# Altium PCB BMS_V1.PcbDoc
Units mil, origin at the board's own origin, x right, y up, seen from the top; angles counter-clockwise.
Board outline 3685 x 3275 mil, 4 copper layers (Top Layer, Layer 1, Layer 2, Bottom Layer), stack 23.756 mil thick; 58 components, 44 nets, 261 pads, 41 vias.
Unrouted connection lines stored in the file: 2.
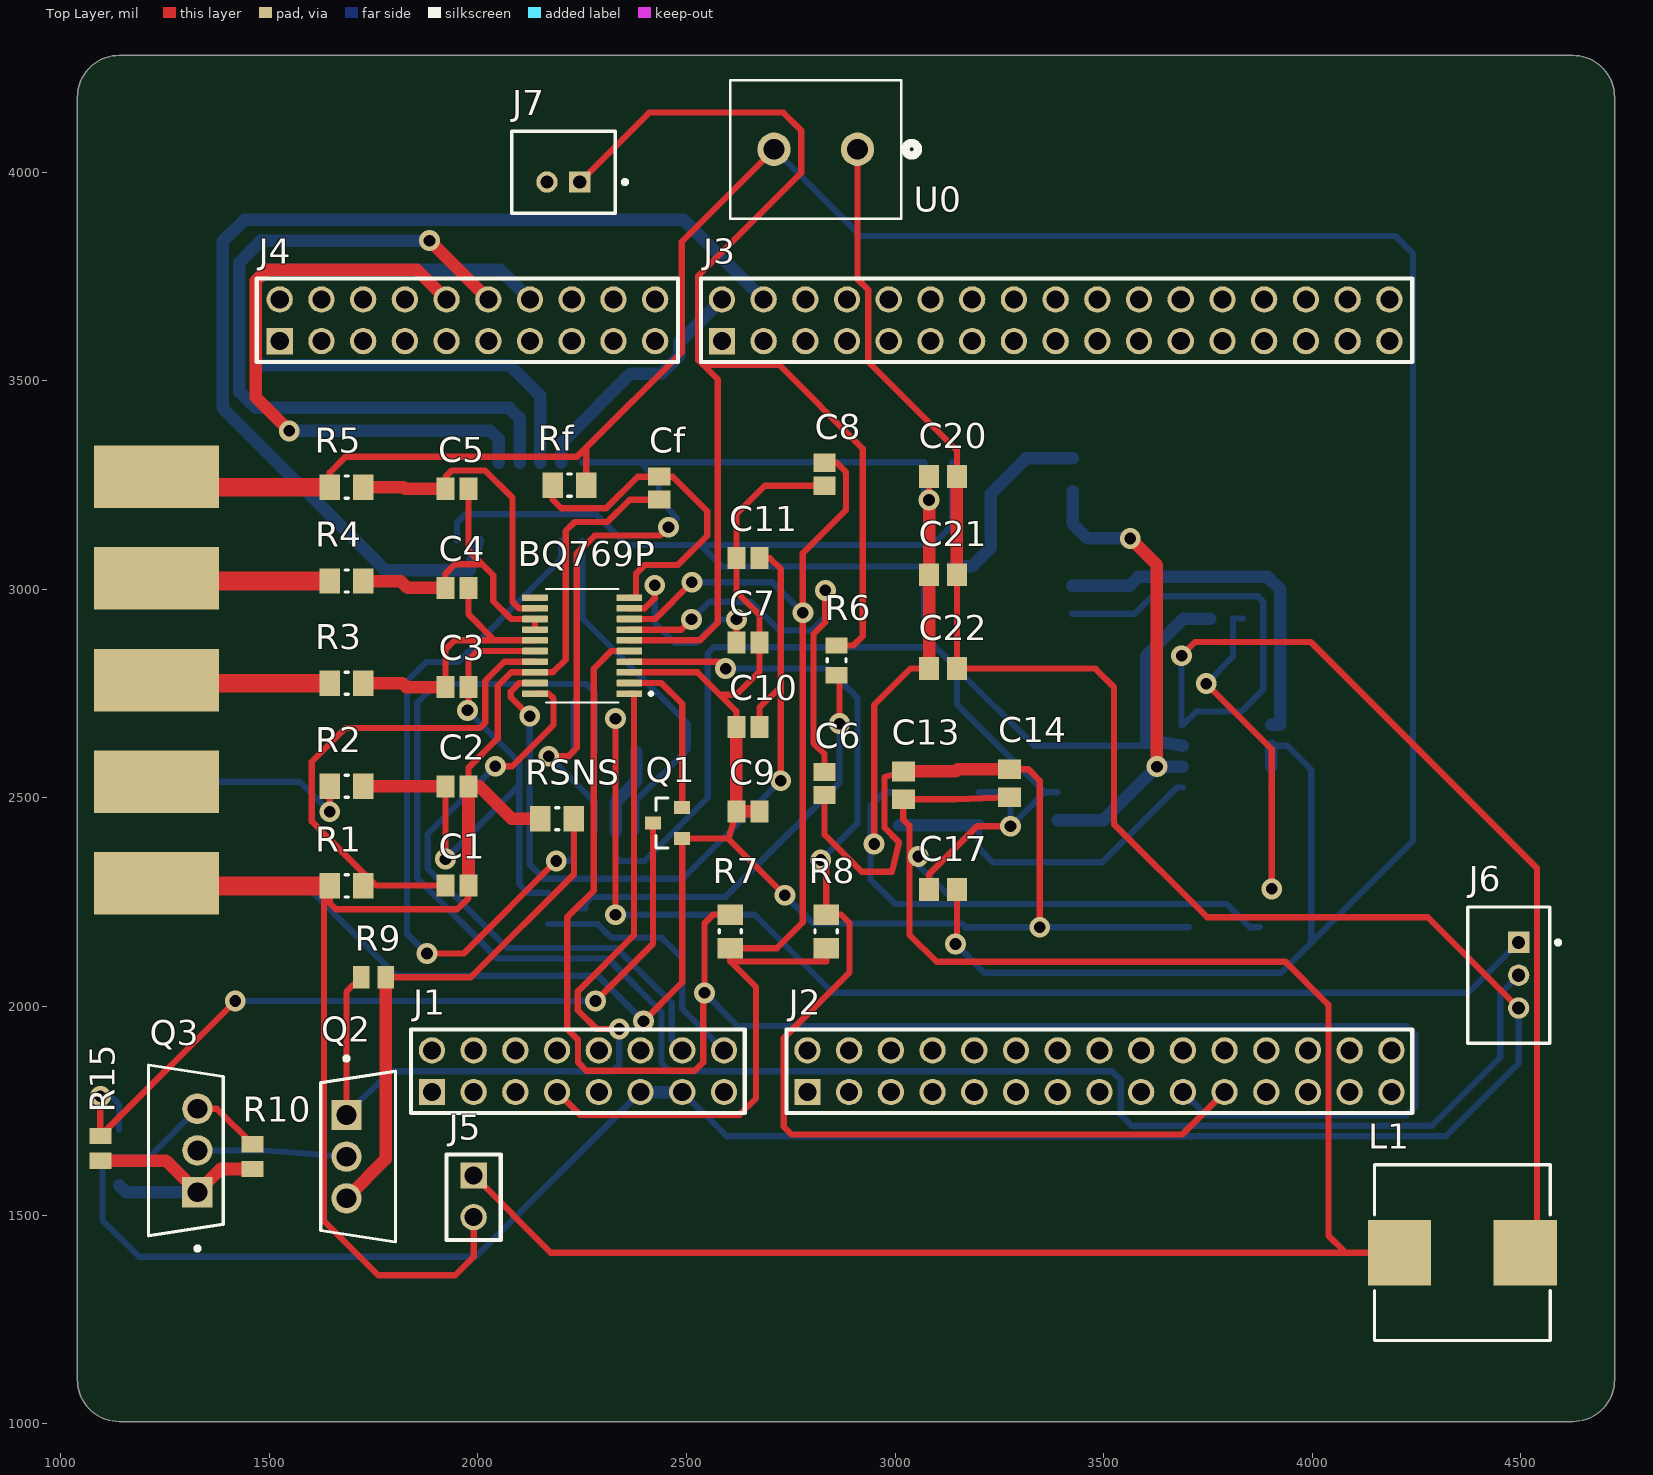
[diagram p0: Top Layer view]
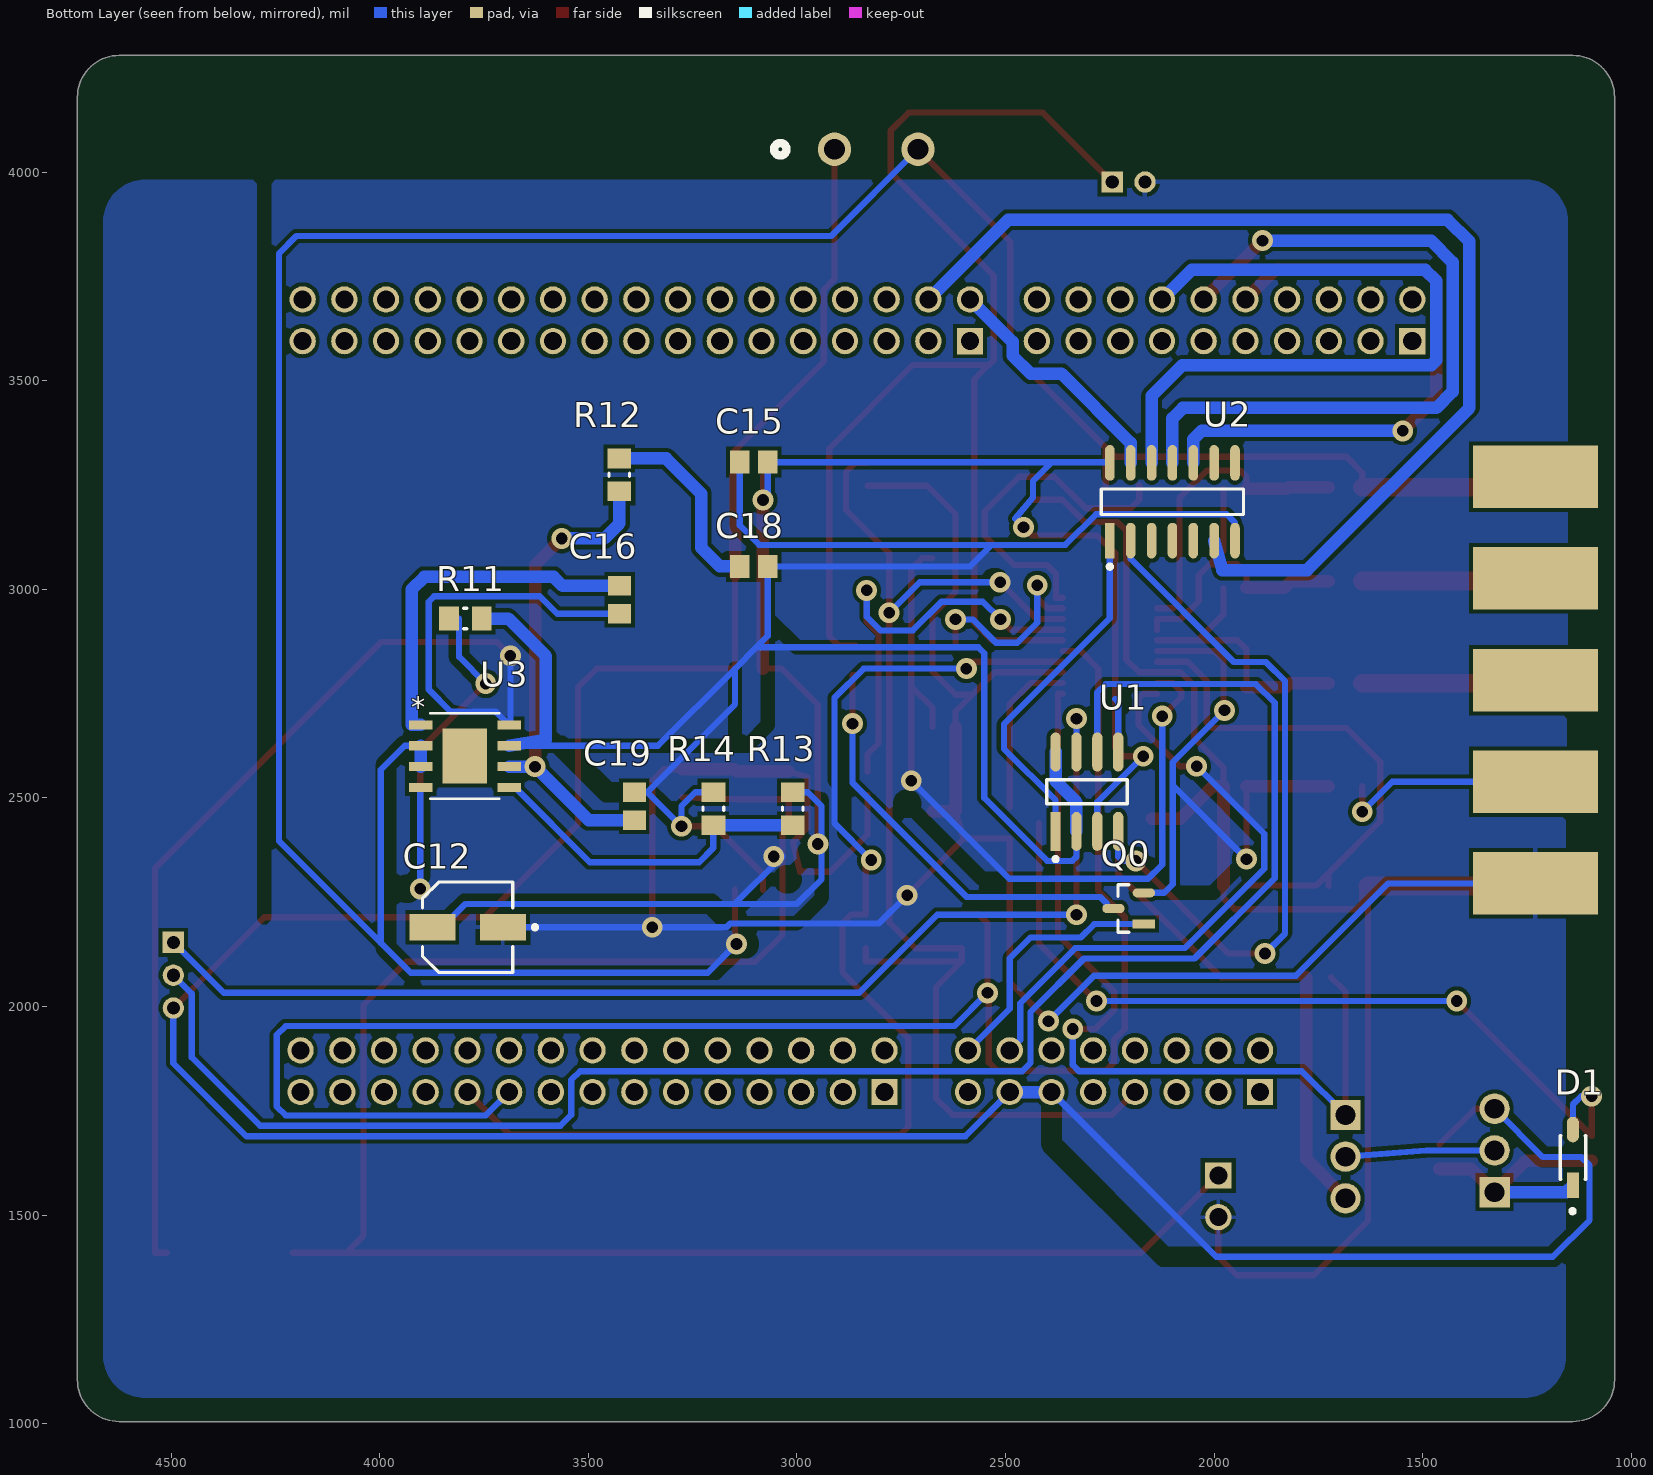
[diagram p1: Bottom Layer view, seen from below]
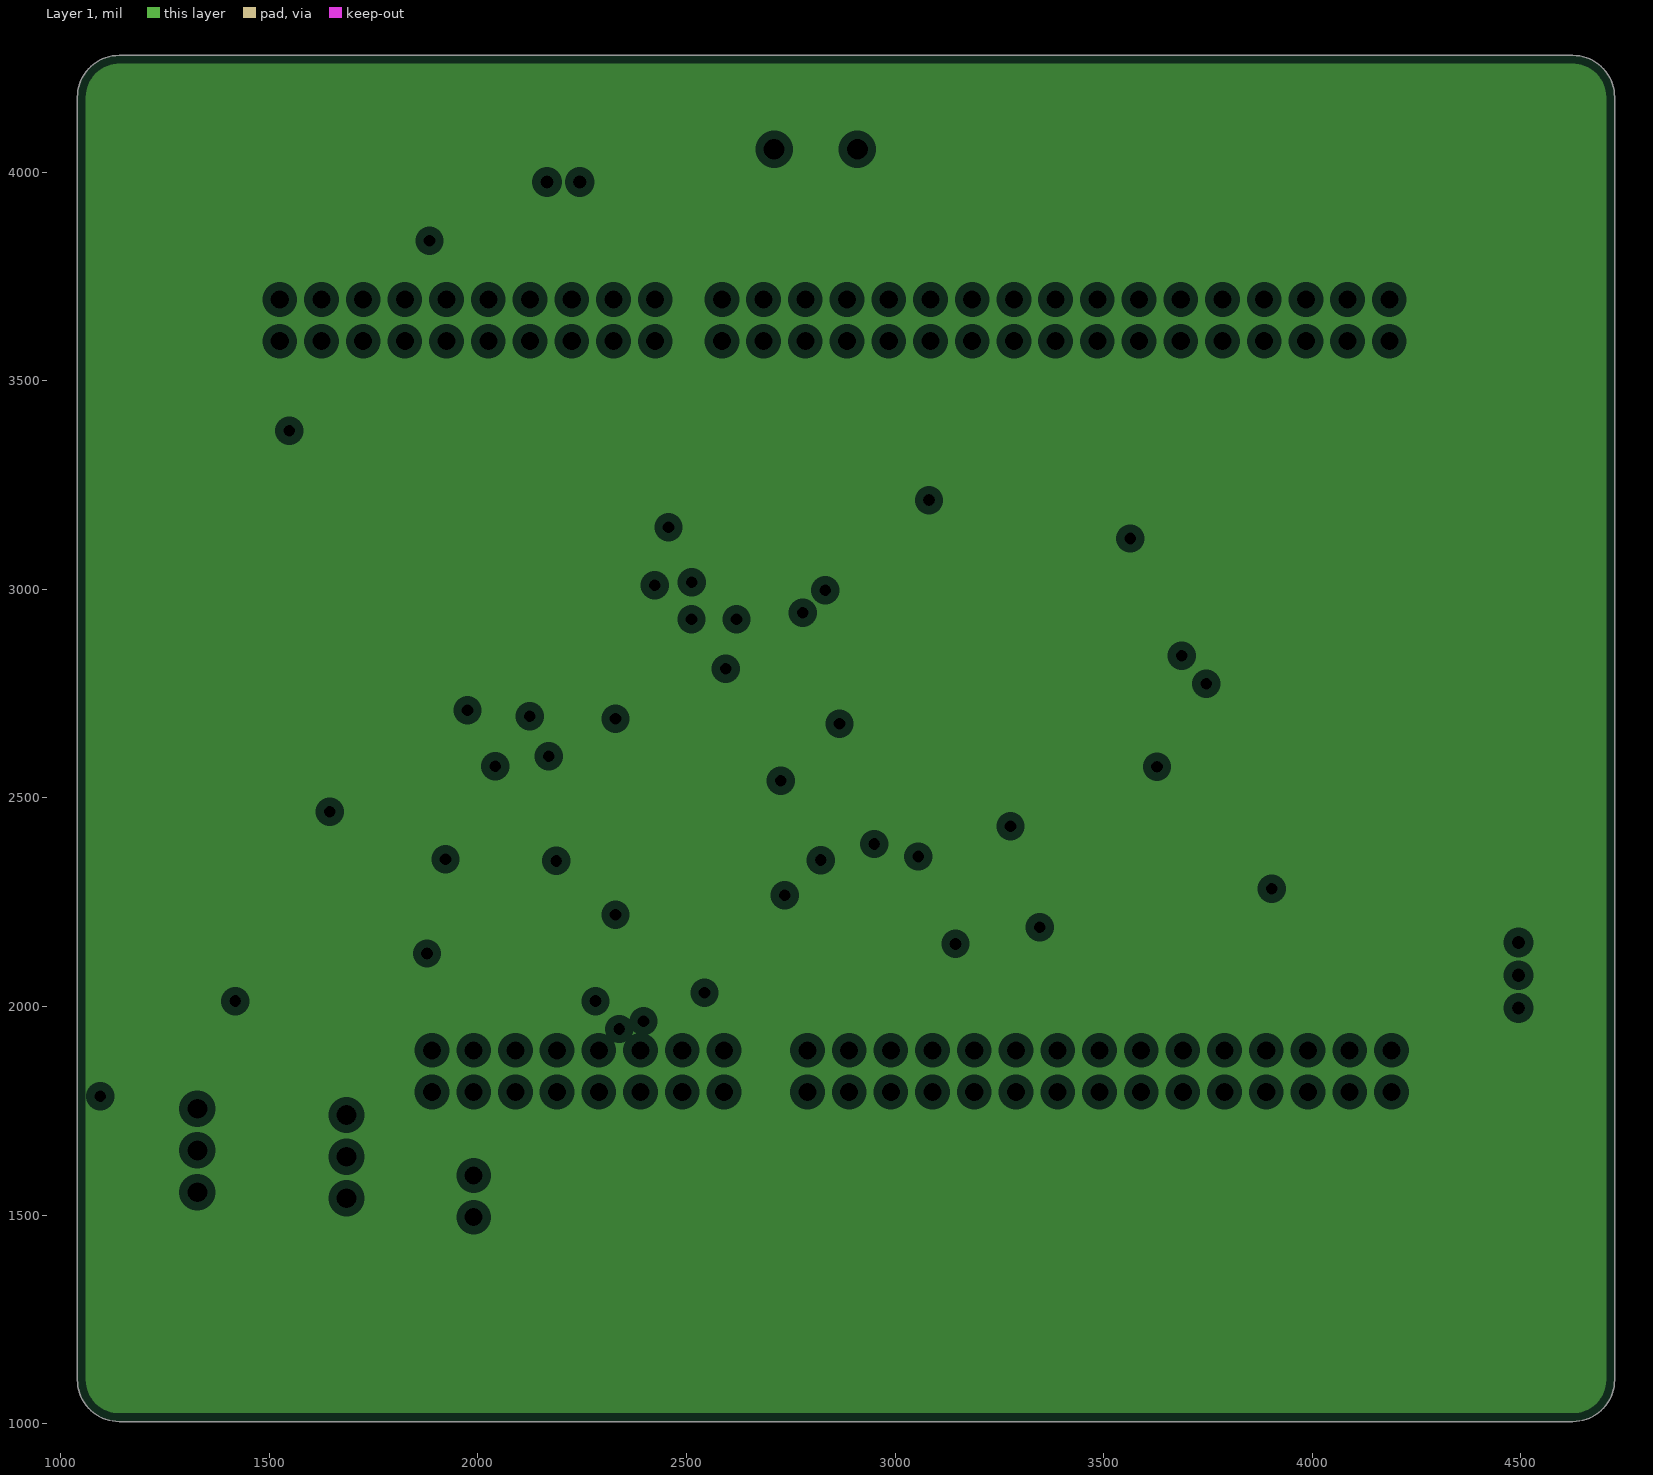
[diagram p2: Layer 1, clearances drawn from the general rule]
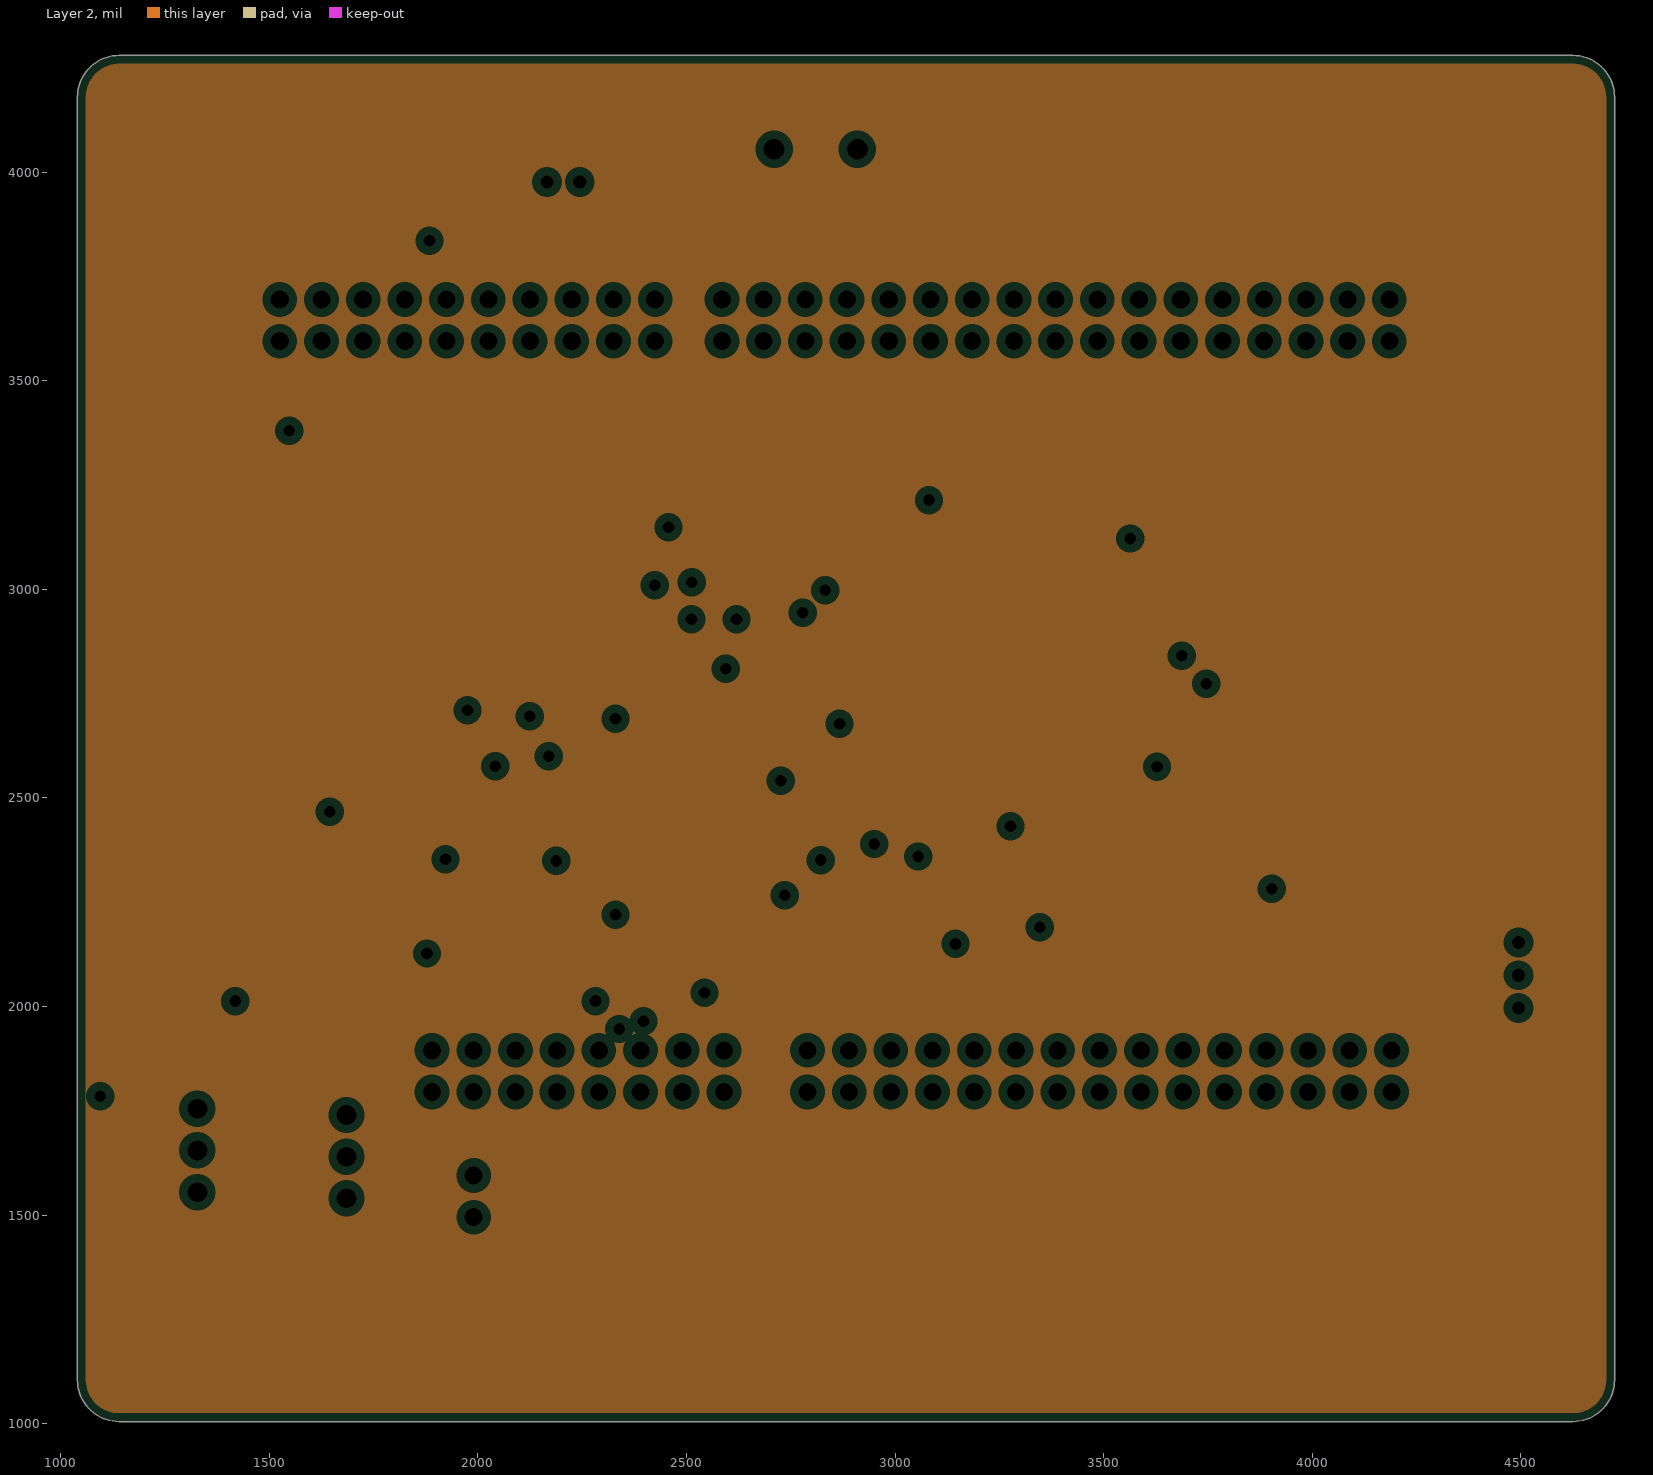
[diagram p3: Layer 2, clearances drawn from the general rule]
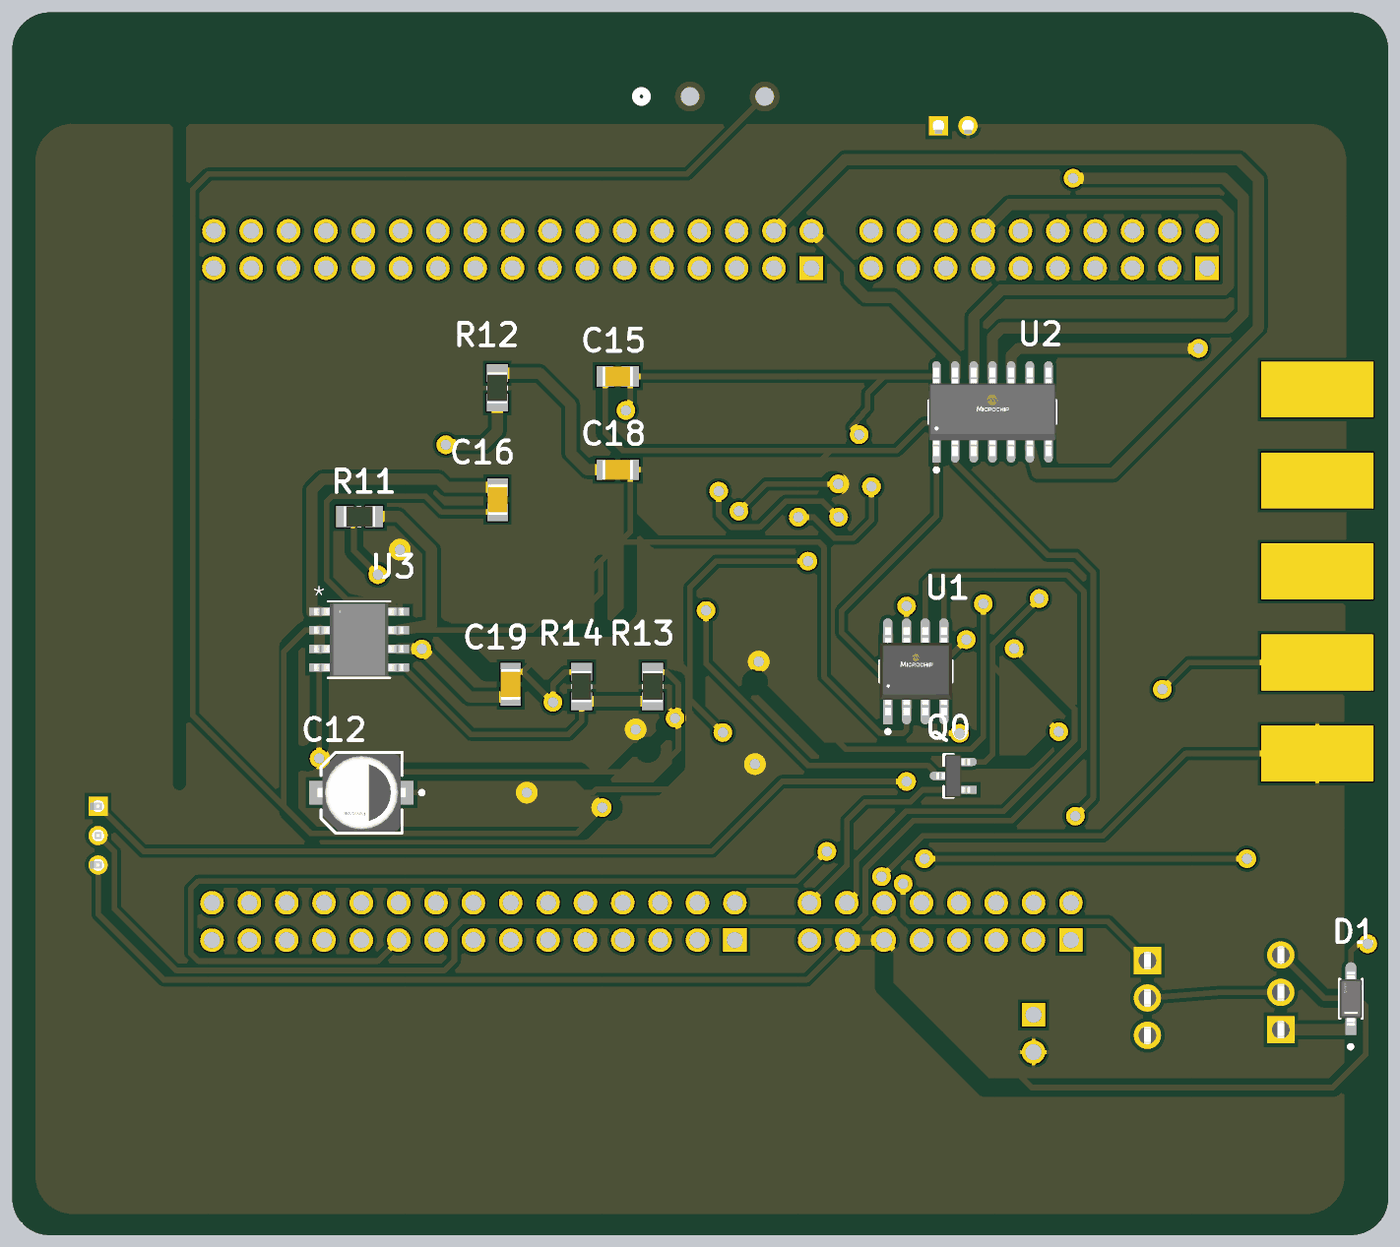
[diagram p4: 3D render of the assembled board from below, using the file's embedded part models]

## Layer stack, top to bottom
Top Solder: solder mask 0.4, Solder Resist, Dk 3.5
Top Layer: signal copper 1.4
Dielectric 2: prepreg 2.8, PP-006, Dk 4.1
Layer 1: plane copper 1.378
Dielectric 1: dielectric 12.6, FR-4, Dk 4.8
Layer 2: plane copper 1.378
Dielectric 3: prepreg 2.8, PP-006, Dk 4.1
Bottom Layer: signal copper 1.4
Bottom Solder: solder mask 0.4, Solder Resist, Dk 3.5

## Board outline
1040,4180 cw(c1140,4180) 1140,4280 4625,4280 cw(c4625,4180) 4725,4180 4725,1105 cw(c4625,1105) 4625,1005 1140,1005 cw(c1140,1105) 1040,1105 1040,2625

## Design rules (kind name [scope] priority, off if disabled: settings)
Clearance [All] p1: gap=10 ignorepadtopadclearanceinfootprint=FALSE
PlaneClearance [All] p1: clearance=20
PlaneConnect [All] p1: planeconnectstyle=Relief reliefexpansion=20 reliefentries=4 reliefconductorwidth=10 reliefairgap=10
PolygonConnect [All] p1: connectstyle=Relief reliefconductorwidth=10 reliefentries=4 polygonreliefangle="90 Angle" airgapwidth=10
RoutingVias [All] p1: holewidth=28 width=50 viastyle="Through Hole" minholewidth=28 minwidth=50 maxholewidth=28 maxwidth=50
SolderMaskExpansion [All] p1: expansion=4 istentingtop=FALSE
SupplyNets "Schematic Supply Nets_4" [InNet('V1')] p1: voltage=0.000
SupplyNets "Schematic Supply Nets_3" [InNet('V2')] p2: voltage=0.000
SupplyNets "Schematic Supply Nets_2" [InNet('V3')] p3: voltage=0.000
SupplyNets "Schematic Supply Nets_1" [InNet('5VIN')] p4: voltage=0.000
SupplyNets "Schematic Supply Nets" [InNet('GND')] p5: voltage=0.000
Width [All] p1: maxlimit=50 minlimit=10 preferedwidth=15 minimp=50.000000 maximp=50.000000 favimp=50.000000
28 further rules are at their usual default settings.

## Components (designator, comment, footprint, x,y, rotation, side; value= is the part's Value field where it differs from the comment)
BQ769P "BQ7692006PW" BQ7692006PW 2250,2865 r180 top
C1 "1 uF 0805" CAPC2013X140X50LL20T25 1950,2290 r0 top
C2 "1 uF 0805" CAPC2013X140X50LL20T25 1950,2527.77 r180 top
C3 "1 uF 0805" CAPC2013X140X50LL20T25 1950,2765.53 r180 top
C4 "1 uF 0805" CAPC2013X140X50LL20T25 1950,3003.3 r180 top
C5 "1 uF 0805" CAPC2013X140X50LL20T25 1950,3241.06 r180 top
C6 "1 uF 0805" CAPC2013X140X50LL20T25 2831.06,2534.8 r90 top
C7 "1 uF 0805" CAPC2013X140X50LL20T25 2647.44,2872.5 r180 top
C8 "4.7 uF 0805" CAPC2013X140X50LL20T25 2831.06,3275.91 r90 top
C9 "0.1 uF" CAPC2013X140X50LL20T25 2647.44,2467.5 r180 top
C10 "0.1 uF" CAPC2013X140X50LL20T25 2647.44,2670 r180 top
C11 "0.1 uF" CAPC2013X140X50LL20T25 2647.44,3075 r0 top
C12 "10uF" FP-FKC-MFG 3789.65,2190 r0 bottom
C13 "0.1 uF" CAPC2013X135X45NL10T25 3020,2530 r270 top
C14 "0.1 uF" CAPC2013X135X45NL10T25 3275,2535 r270 top
C15 "0.1 uF" CAPC2013X135X45NL10T25 3103.46,3305 r0 bottom
C16 "0.1 uF" CAPC2013X135X45NL10T25 3425,2975 r90 bottom
C17 "10 uF" CAPC2013X135X45NL10T25 3115,2280 r0 top
C18 "3.3 nF" CAPC2013X135X45NL10T25 3103.46,3055 r0 bottom
C19 "47pF" CAPC2013X135X45NL10T25 3390,2480 r270 bottom
C20 "22 uF" CAPC2013X135X45NL10T25 3115,3270 r180 top
C21 "22 uF" CAPC2013X135X45NL10T25 3115,3035 r180 top
C22 "22 uF" CAPC2013X135X45NL10T25 3115,2810 r180 top
Cf "10 uF 0805" CAPC2013X140X50LL20T25 2435,3242.56 r90 top
D1 "1N5819HW" FP-SOD123-IPC_A 1140,1638.06 r90 bottom
J1 "CN8 CONN HDR 16POS" CN8_8X2_PADS 1889.92,1795 r90 top
J2 "CN9 CONN HDR 30POS" CN9_15X2_PADS 2790,1795 r90 top
J3 "CN10 CONN HDR 34POS" CN10_17X2_PADS 2585,3595 r90 top
J4 "CN7 CONN HDR 20POS" CN7_10X2_PADS 1525,3595 r90 top
J5 "5V_EXT" 5V_EXT 1990,1595 r0 top
J6 "440054-3" FP-440054-3-MFG 4471.38,2075 r90 top
J7 "440054-2" FP-440054-2-MFG 2205,4000 r0 top
L1 "5.5 uH" WE-HCI_1050 4360,1410 r270 top
Q0 "2N7002NXAKR" FP-SOT23-IPC_B 2205,2235 r0 bottom
Q1 "IRLML6401TRPBF" FP-SOT23-MFG 2454.84,2440 r180 top
Q2 "IRFB7430PBF" FP-PG-TO220-3-MFG 1712.76,1640 r0 top
Q3 "IRFB7430PBF" FP-PG-TO220-3-MFG 1300,1655 r180 top
R1 "100 Ohm 0805" RESC2013X60X30ML20T20 1685.35,2288.94 r0 top
R2 "100 Ohm 0805" RESC2013X60X30ML20T20 1685.35,2527.95 r0 top
R3 "100 Ohm 0805" RESC2013X60X30ML20T20 1685.35,2775 r0 top
R4 "100 Ohm 0805" RESC2013X60X30ML20T20 1685.35,3020 r0 top
R5 "100 Ohm 0805" RESC2013X60X30ML20T20 1685.35,3245 r0 top
R6 "RC0805FR-0710KL" RESC2013X60X35NL10T20 2860,2830 r270 top
R7 "10k Ohm 0805" RESC2013X60X30ML20T20 2605,2180 r270 top
R8 "10k Ohm 0805" RESC2013X60X30ML20T20 2835,2180 r270 top
R9 "ERA-6AEB105V" RESC2013X60X40LL20T25 1749.53,2070 r180 top
R10 "ERA-6AEB105V" RESC2013X60X40LL20T25 1460,1640 r270 top
R11 "200k" RESC2013X60X35ML10T20 3795,2930 r0 bottom
R12 "14k" RESC2013X60X35ML10T20 3425.98,3274.37 r270 bottom
R13 "115k" RESC2013X60X35ML10T20 3010,2474.09 r90 bottom
R14 "22.1k" RESC2013X60X35ML10T20 3200.49,2474.09 r270 bottom
R15 "1M Ohm" RESC2013X60X40LL20T25 1095,1660 r90 top
Rf "100 Ohm 0805" RESC2013X60X30ML20T20 2219.65,3250 r0 top
RSNS "5m Ohm 0805" RESC2013X60X30ML20T20 2190,2450 r180 top
U0 "282837-2" 282837-2_TYC 2910,4055 r180 top
U1 "MCP2562FDT-H/SN" FP-C04-057-SN-IPC_A 2305,2515 r90 bottom
U2 "MCP2518FDT-H/SL" FP-C04-065-SL-IPC_B 2100,3210 r90 bottom
U3 "AP64350SP-13" SO-8EP_DIO 3796.14,2600 r180 bottom

## Footprints (in the part's own frame and the unit in brackets; to place one, negate y for a bottom-side part, rotate by r counter-clockwise, add the part's x,y. Pads: shape width x height; smd on the part's side, far side on the other; paste and mask are expansions set on the pad)
5V_EXT [mm]
  rect 1.6x1.6 hole 1.1: 1(0,0)
  round 1.6 hole 1.1: 2(0,-2.54)
  silkscreen extent -1.65,-3.94 1.65,1.27
282837-2_TYC [mil]
  round 80 / inner round 60 / far side round 80 hole 50 paste-99999 mask-40: 1(0,0) 2(200,0)
  silkscreen extent -145,-166 305,166
BQ7692006PW [mm]
  rrect25% 1.57x0.41 smd: 1(-2.87,2.925) 2(-2.87,2.275) 3(-2.87,1.625) 4(-2.87,0.975) 5(-2.87,0.325) 6(-2.87,-0.325) 7(-2.87,-0.975) 8(-2.87,-1.625) 9(-2.87,-2.275) 10(-2.87,-2.925) 11(2.87,-2.925) 12(2.87,-2.275) 13(2.87,-1.625) 14(2.87,-0.975) 15(2.87,-0.325) 16(2.87,0.325) 17(2.87,0.975) 18(2.87,1.625) 19(2.87,2.275) 20(2.87,2.925)
  silkscreen extent -4.29,-3.45 2.2,3.45, body extent -3.2,-3.25 3.2,3.25, height 1.2
CAPC2013X135X45NL10T25 [mm] "Chip Capacitor, 2-Leads, Body 2.10x1.35mm, IPC Medium Density"
  rect 1.2x1.4 smd: 1(-0.85,0) 2(0.85,0)
  body extent -1.05,-0.67 1.05,0.67, height 1.35
CAPC2013X140X50LL20T25 [mm] "Chip Capacitor, 2-Leads, Body 2.00x1.25mm, IPC High Density"
  rect 1.1x1.35 smd: 1(-0.7,0) 2(0.7,0)
  body extent -1.1,-0.72 1.1,0.72, height 1.4
CN7_10X2_PADS [mm]
  rect 1.6x1.6 hole 1.1: 1(0,0)
  round 1.6 hole 1.1: 2(2.54,0) 3(0,-2.54) 4(2.54,-2.54) 5(0,-5.08) 6(2.54,-5.08) 7(0,-7.62) 8(2.54,-7.62) 9(0,-10.16) 10(2.54,-10.16) 11(0,-12.7) 12(2.54,-12.7) 13(0,-15.24) 14(2.54,-15.24) 15(0,-17.78) 16(2.54,-17.78) 17(0,-20.32) 18(2.54,-20.32) 19(0,-22.86) 20(2.54,-22.86)
  silkscreen extent -1.27,-24.26 3.81,1.4
CN8_8X2_PADS [mm]
  rect 1.6x1.6 hole 1.1: 1(0,0)
  round 1.6 hole 1.1: 2(2.54,0) 3(0,-2.54) 4(2.54,-2.54) 5(0,-5.08) 6(2.54,-5.08) 7(0,-7.62) 8(2.54,-7.62) 9(0,-10.16) 10(2.54,-10.16) 11(0,-12.7) 12(2.54,-12.7) 13(0,-15.24) 14(2.54,-15.24) 15(0,-17.78) 16(2.54,-17.78)
  silkscreen extent -1.27,-19.05 3.81,1.27
CN9_15X2_PADS [mm]
  rect 1.6x1.6 hole 1.1: 1(0,0)
  round 1.6 hole 1.1: 2(2.54,0) 3(0,-2.54) 4(2.54,-2.54) 5(0,-5.08) 6(2.54,-5.08) 7(0,-7.62) 8(2.54,-7.62) 9(0,-10.16) 10(2.54,-10.16) 11(0,-12.7) 12(2.54,-12.7) 13(0,-15.24) 14(2.54,-15.24) 15(0,-17.78) 16(2.54,-17.78) 17(0,-20.32) 18(2.54,-20.32) 19(0,-22.86) 20(2.54,-22.86) 21(0,-25.4) 22(2.54,-25.4) 23(0,-27.94) 24(2.54,-27.94) 25(0,-30.48) 26(2.54,-30.48) 27(0,-33.02) 28(2.54,-33.02) 29(0,-35.56) 30(2.54,-35.56)
  silkscreen extent -1.27,-36.83 3.81,1.27
CN10_17X2_PADS [mm]
  rect 1.6x1.6 hole 1.1: 1(0,0)
  round 1.6 hole 1.1: 2(2.54,0) 3(0,-2.54) 4(2.54,-2.54) 5(0,-5.08) 6(2.54,-5.08) 7(0,-7.62) 8(2.54,-7.62) 9(0,-10.16) 10(2.54,-10.16) 11(0,-12.7) 12(2.54,-12.7) 13(0,-15.24) 14(2.54,-15.24) 15(0,-17.78) 16(2.54,-17.78) 17(0,-20.32) 18(2.54,-20.32) 19(0,-22.86) 20(2.54,-22.86) 21(0,-25.4) 22(2.54,-25.4) 23(0,-27.94) 24(2.54,-27.94) 25(0,-30.48) 26(2.54,-30.48) 27(0,-33.02) 28(2.54,-33.02) 29(0,-35.56) 30(2.54,-35.56) 31(0,-38.1) 32(2.54,-38.1) 33(0,-40.64) 34(2.54,-40.64)
  silkscreen extent -1.27,-42.04 3.81,1.27
FP-440054-2-MFG [mm]
  rect 1.3x1.3 hole 0.8 paste-2539.97 mask+0: 1(1,-0.6)
  round 1.3 hole 0.8 paste-2539.97 mask+0: 2(-1,-0.6)
  silkscreen extent -3.15,-2.5 3.88,2.5, body extent -3.25,-2.6 3.25,2.6, height 0.25
FP-440054-3-MFG [mm]
  rect 1.3x1.3 hole 0.8 paste-2539.97 mask+0: 1(2,-0.6)
  round 1.3 hole 0.8 paste-2539.97 mask+0: 2(0,-0.6) 3(-2,-0.6)
  silkscreen extent -4.15,-3.13 4.15,2.5, body extent -4.25,-2.6 4.25,2.6, height 0.25
FP-C04-057-SN-IPC_A [mil]
  rect 93.59x24.49 smd paste+0 mask+0: 1(-95.18,75)
  rrect100% 93.59x24.49 smd paste+0 mask+0: 2(-95.18,25) 3(-95.18,-25) 4(-95.18,-75) 5(95.18,-75) 6(95.18,-25) 7(95.18,25) 8(95.18,75)
  silkscreen extent -167,-96 29,96, body extent -118,-96 118,96, height 69
FP-C04-065-SL-IPC_B [mil]
  rect 85.59x22.92 smd paste+0 mask+0: 1(-93.15,150)
  rrect100% 85.59x22.92 smd paste+0 mask+0: 2(-93.15,100) 3(-93.15,50) 4(-93.15,0) 5(-93.15,-50) 6(-93.15,-100) 7(-93.15,-150) 8(93.15,-150) 9(93.15,-100) 10(93.15,-50) 11(93.15,0) 12(93.15,50) 13(93.15,100) 14(93.15,150)
  silkscreen extent -161,-170 31,170, body extent -118,-170 118,170, height 69
FP-FKC-MFG [mm]
  rect 2.8x1.6 smd paste+0 mask+0: 1(-2.15,0) 2(2.15,0)
  silkscreen extent -4.22,-2.75 2.75,2.75, body extent -3,-2.65 3,2.65, height 6.1
FP-PG-TO220-3-MFG [mm]
  rect 1.85x1.85 hole 1.2 paste-2539.97 mask+0: 1(-0.705,2.54)
  round 1.85 hole 1.2 paste-2539.97 mask+0: 2(-0.705,0) 3(-0.705,-2.54)
  silkscreen extent -2.27,-5.2 2.27,6.1, body extent -2.37,-5.55 2.37,5.55, height 0.25
FP-SOD123-IPC_A [mil]
  rect 61.32x29.23 smd paste+0 mask+0: 1(-66.94,0)
  rrect100% 61.32x29.23 smd paste+0 mask+0: 2(66.94,0)
  silkscreen extent -134,-31 52,31, body extent -72,-31 72,31, height 57
FP-SOT23-IPC_B [mm]
  rect 1.355x0.562 smd paste+0 mask+0: 1(-0.925,0.95)
  rrect100% 1.355x0.562 smd paste+0 mask+0: 2(-0.925,-0.95) 3(0.925,0)
  silkscreen extent 0,-1.45 0.65,1.45, body extent -1.15,-1.45 1.15,1.45, height 1.1
FP-SOT23-MFG [mm]
  rect 0.972x0.802 smd paste+0 mask+0: 1(-0.885,0.95) 2(-0.885,-0.95) 3(0.885,0)
  silkscreen extent -0.02,-1.52 0.7,1.52, body extent -1.47,-1.62 1.47,1.62, height 0.25
RESC2013X60X30ML20T20 [mm] "Chip Resistor, 2-Leads, Body 2.00x1.25mm, IPC Low Density"
  rect 1.25x1.55 smd: 1(-1.025,0) 2(1.025,0)
  silkscreen extent -0.1,-0.68 0.1,0.68, body extent -1.1,-0.72 1.1,0.72, height 0.6
RESC2013X60X35ML10T20 [mm] "Chip Resistor, 2-Leads, Body 2.1x1.35mm, IPC Low Density"
  rect 1.2x1.45 smd: 1(-1,0) 2(1,0)
  silkscreen extent -0.1,-0.62 0.1,0.62, body extent -1.05,-0.68 1.05,0.67, height 0.6
RESC2013X60X35NL10T20 [mm] "Chip Resistor, 2-Leads, Body 2.1x1.35mm, IPC Medium Density"
  rect 1x1.35 smd: 1(-0.9,0) 2(0.9,0)
  silkscreen extent -0.1,-0.58 0.1,0.58, body extent -1.05,-0.68 1.05,0.67, height 0.6
RESC2013X60X40LL20T25 [mm] "Chip Resistor, 2-Leads, Body 2.00x1.25mm, IPC High Density"
  rect 1x1.35 smd: 1(-0.75,0) 2(0.75,0)
  body extent -1.1,-0.72 1.1,0.72, height 0.6
SO-8EP_DIO [mil]
  rect 56x22 smd paste+0 mask+0: 1(-106,75) 2(-106,25) 3(-106,-25) 4(-106,-75) 5(106,-75) 6(106,-25) 7(106,25) 8(106,75)
  rect 107x132 smd paste-65.5 mask+0: EPAD(0,0)
  silkscreen extent -83,-103 83,103, body extent -120,-97 120,97, height 64
WE-HCI_1050 [mm] "SMT Flat Wire High Current Inductor, body 10.2x10.2mm"
  rect 4x3.85 smd: 1(0,3.825) 2(0,-3.825)
  silkscreen extent -5.35,-5.35 5.35,5.35, body extent -5.1,-5.5 5.1,5.5, height 5

## Part data
BQ769P: library part CMP-006-000000-1, "3 to 5-Series Cell Li-Ion and Li-Phosphate Battery Monitor (bq76940 Family)", Package="TSSOP-20 Texas Instruments", Check_prices=https://www.snapeda.com/parts/BQ7692006PW/Texas+Instruments/view-part/?ref=eda, Component Type=Standard, Design Item ID=BQ7692006PW, MF="Texas Instruments", MP=BQ7692006PW, Pin Count=20, SnapEDA_Link=https://www.snapeda.com/parts/BQ7692006PW/Texas+Instruments/view-part/?ref=snap, Source=BQ7692006PW.SchLib
C1 C2 C3 C4 C5 C6 C7 C8 C9 C10 C11 Cf: library part CMP-2007-03234-1, Manufacturer=Kemet, Part Number=C0805C105K3RACTU
C12: library part CMP-05427-000030-1, "CAP ALUM 10UF 20% 50V SMD", Case/Package=Radial, Dielectric Material=Aluminium, ESR (Equivalent Series Resistance)=1.52R, Leakage Current=3uA, Max Operating Temperature=105°C, Min Operating Temperature=-55°C, Package Quantity=1000, Ripple Current=85mA, Tolerance=20%, Voltage=50V, Capacitance=10uF, Construction=Cylindrical, Contact Plating=Tin, Diameter=5mm, Height=5.8mm, Height - Seated (Max)=0.228inch, Impedance=1.52R, Lead Free="Lead Free", Length=5.8mm, Life (Hours)=2000Hour, Material=Aluminium, Mount="Surface Mount", Number of Pins=2, Packaging="Tape and Reel", Radiation Hardening=No, REACH SVHC="No SVHC", Ripple Current (AC)=85mA, RoHS Compliant=Yes, Series=FK, Termination=SMD/SMT, Voltage Rating=50V, Voltage Rating (DC)=50V, Width=6.5mm
C13 C14 C15 C16 C17 C18 C19 C20 C21 C22: library part CMP-1662-00015-2, "Chip Capacitor, 4.7 uF, +/- 10%, 16 V, -55 to 85 degC, 0805 (2012 Metric), RoHS, Tape and Reel", Capacitance="4.7 uF", Case Code (Imperial)=0805, Case Code (Metric)=2012, Max Operating Temperature="85 degC", Min Operating Temperature="-55 degC", Package Quantity=3000, PartNumber=GRM21BR61C475KA88L, Tolerance=10%, Type (Capacitors)=X5R, Voltage Rating="16 V", Case\/Package=0805, ComponentLink1Description="Manufacturer URL", ComponentLink1URL=http://www.murata.com/, ComponentLink2Description=Datasheet, ComponentLink2URL=http://search.murata.co.jp/Ceramy/image/img/A01X/G101/ENG/GRM21BR61C475KA88-01.pdf, DatasheetVersion=03/2016, Height="1.25 mm", Length="2 mm", Mount="Surface Mount", Mounting Technology="Surface Mount", PackageDescription="2-Pin Surface Mount Device, Body 2 x 1.25 mm", PackageReference=0805, Packaging="Tape and Reel", Pins=2, Radiation Hardening=No, REACH SVHC="No SVHC", RoHSCompliant=true, Voltage Rating (DC)="16 V", Width="1.25 mm"
D1: library part CMP-0303-00003-3, "DIODE SCHOTTKY 40V 1A SOD123", Average Rectified Current=1A, Capacitance=110pF, Case/Package=SOD-123-2, Forward Voltage=450mV, Max Forward Surge Current (Ifsm)=25A, Max Operating Temperature=125°C, Max Power Dissipation=450mW, Max Repetitive Reverse Voltage (Vrrm)=40V, Min Operating Temperature=-65°C, Package Quantity=3000, Peak Reverse Current=50uA, Contact Plating=Tin, Current Rating=1A, Element Configuration=Single, Forward Current=1A, Height=1.25mm, Lead Free="Lead Free", Length=2.85mm, Max Reverse Voltage (DC)=40V, Number of Pins=2, Output Current=1A, Packaging="Tape and Reel", Peak Non-Repetitive Surge Current=25A, Polarity=Standard, Radiation Hardening=No, REACH SVHC="No SVHC", Termination=SMD/SMT, Voltage Rating (DC)=40V, Weight=0.000353oz, Width=1.7mm
J1: library part CMP-009-000002-1, "CN8 CONN HDR 16POS 0.1 STACK", Design Item ID="CN8 CONN HDR 16POS", Source=Schlib2.SchLib
J2: library part CMP-009-000003-1, "CN9 CONN HDR 30 POS  0.1 STACK", Design Item ID="CN9 CONN HDR 30POS", Source=Schlib2.SchLib
J3: library part CMP-009-000004-1, "CN10 CONN HDR 34 POS  0.1 STACK", Design Item ID="CN10 CONN HDR 34POS", Source=Schlib2.SchLib
J4: library part CMP-009-000001-1, "CN7 CONN HDR 20 POS  0.1 STACK", Design Item ID="CN7 CONN HDR 20POS", Source=Schlib2.SchLib
J5: library part CMP-011-000000-1, Design Item ID=5V_EXT, Source=Schlib2.SchLib
J6: library part CMP-03369-000008-1, "CONN HEADER VERT 3POS 2MM", Current Rating=3A, Manufacturer="TE Connectivity", Package=0, Temperature="-25°C to +105°C", Temperature Range High=+105°C, Temperature Range Low=-25°C, Voltage Rating=250V, Automotive=No, Category=Conn, ComponentLink2Description=Datasheet, ComponentLink2URL=https://www.te.com/usa-en/product-440054-3.datasheet.pdf, Conn Gender=Male, Conn Orientation=Vertical, Contact Material=Tin,Nickel, Device Class L1=Connectors, Device Class L2="Headers and Wire Housings", Device Class L3=unset, Digikey Description="CONN HEADER VERT 3POS 2MM", Footprint Url=https://www.te.com/commerce/DocumentDelivery/DDEController?Action=showdoc&DocId=Customer+Drawing%7F440054%7FF6%7Fpdf%7FEnglish%7FENG_CD_440054_F6.pdf%7F440054-3, Height=6.35mm, Lead Free=Yes, Manufacturer Part Number=440054-3, Mouser Description="Headers & Wire Housings 3 POS HDR VERT 2.0mm", Number Of Contacts=3, Number Of Rows=1, Octopart=https://octopart.com/440054-3-te+connectivity-40394845, Pitch=2mm, RoHS=TRUE
J7: library part CMP-03369-000005-1, "CONN HEADER VERT 2POS 2MM", Current Rating=3A, Manufacturer="TE Connectivity", Temperature="-25°C to +85°C", Temperature Range High=+85°C, Temperature Range Low=-25°C, Voltage Rating=250V, Automotive=No, Category=Conn, ComponentLink2Description=Datasheet, ComponentLink2URL=https://www.te.com/usa-en/product-440054-2.datasheet.pdf, Conn Gender=Male, Conn Orientation=Vertical, Contact Material=Tin,Nickel, Device Class L1=Connectors, Device Class L2="Headers and Wire Housings", Device Class L3=unset, Digikey Description="CONN HEADER VERT 2POS 2MM", Footprint Url=https://www.te.com/commerce/DocumentDelivery/DDEController?Action=showdoc&DocId=Customer+Drawing%7F440054%7FF6%7Fpdf%7FEnglish%7FENG_CD_440054_F6.pdf%7F440054-2, Height=6.35mm, Lead Free=Yes, Manufacturer Part Number=440054-2, Mouser Description="Headers & Wire Housings 2.0mm HDR 2pos VERT HPI", Number Of Contacts=2, Number Of Rows=1, Octopart=https://octopart.com/440054-2-te+connectivity-40237927, Package=440054-2, Pitch=2mm, RoHS=TRUE
L1: library part CMP-0226-00138-2, Ambient Temperature Range High=100°C, Ambient Temperature Range Low=-40°C, Case/Package=1050, Current Rating=10A, DC Resistance (DCR)=10.3mΩ, Inductance=5.5µH, Inductance Tolerance=20%, Max Operating Temperature=150°C, Saturation Current=12A, Self Resonant Frequency=30MHz, Series Resistance=10.3Ω, Test Frequency=100kHz, Composition=Wirewound, Depth=10.2mm, Height=4.7mm, Height - Seated (Max)=5.0038mm, Lead Free="Lead Free", Length=10.5mm, Max DC Current=10A, Min Operating Temperature=-40°C, Mount="Surface Mount", NexarPartId=7866439, Number of Pins=2, Packaging="Cut Tape (CT)", REACH SVHC=Unknown, Resistance=10.3mΩ, RMS Current (Irms)=10A, RoHS=Compliant, Shielding=Shielded, Termination=SMD/SMT, Tolerance=20%, Width=10.2mm
Q0: library part CMP-14409-000026-2, "2N7002NXAK/SOT23/TO-236AB"
Q1: library part CMP-32901-000098-1, "MOSFET P-CH 12V 4.3A SOT-23", Continuous Drain Current=-4.3A, Drain To Source Breakdown Voltage=-12V, Drain To Source Resistance=0.05Ω, Gate To Source Voltage=8V, Input Capacitace At Vds="830pF @ -10V", Manufacturer=Infineon, Max Forward Diode Voltage=-1.2V, Max Junction Temp=+150°C, Package=SOT23, Power Dissipation=1.3W, Pulse Drain Current=-34A, Temperature="-55°C to +150°C", Temperature Range Low=-55°C, Automotive=No, Category=Trans, ComponentLink2Description=Datasheet, ComponentLink2URL=https://www.infineon.com/dgdl/irlml6401pbf.pdf?fileId=5546d462533600a401535668b96d2634, Depletion Mode=False, Device Class L1="Discrete Semiconductors", Device Class L2=Transistors, Device Class L3=MOSFETs, Digikey Description="MOSFET P-CH 12V 4.3A SOT-23", Drain To Source Voltage=-12V, Gate Charge At Vgs="10nC @ -5V", Height=1.12mm, Ipc Land Pattern Name=SOT95P237X100-3, Lead Free=Yes, Manufacturer Part Number=IRLML6401TRPBF, Number Of Channels=1, Number Of P Channels=1, Octopart=https://octopart.com/irlml6401trpbf-infineon-65874987, Reverse Recovery Charge=8nC, Reverse Recovery Time=22ns, RoHS=TRUE, Rthja Max=75°C/W, Standoff Height=0.01mm, Temperature Range High=+150°C, Threshold Vgs Max=-0.95V, Threshold Vgs Min=-0.4V, Turn Off Delay Time=250ns, Turn On Delay Time=11ns
Q2 Q3: library part CMP-32901-000979-1, "MOSFET N CH 40V 195A TO220", Case/Package=TO-220, Continuous Drain Current (ID)=195A, Drain to Source Voltage (Vdss)=40V, Input Capacitance=14.24nF, Max Operating Temperature=175°C, Max Power Dissipation=375W, Min Operating Temperature=-55°C, Threshold Voltage=2.2V, Halogen Free="Halogen Free", Lead Free="Lead Free", Max Dual Supply Voltage=40V, Mount="Through Hole", Number of Pins=3, Packaging=Rail/Tube, Rds On Max=1.3mR, REACH SVHC="No SVHC", RoHS Compliant=Yes, Series="HEXFET®, StrongIRFET™"
R1 R2 R3 R4 R5 R7 R8 Rf RSNS: library part CMP-2001-01991-1, Manufacturer="KOA Speer", Part Number=RK73H2ATTD1000F
R6: library part CMP-1659-00013-4, "Chip Resistor, 10 KOhm, +/- 1%, 0.125 W, -55 to 155 degC, 0805 (2012 Metric), RoHS, Tape and Reel", Manufacturer=Yageo, Max Operating Temperature="155 degC", Min Operating Temperature="-55 degC", Package Quantity=5000, Voltage Rating="150 V", ComponentLink1Description="Manufacturer URL", ComponentLink1URL=http://www.yageo.com/, ComponentLink2Description=Datasheet, ComponentLink2URL=http://www.yageo.com/documents/recent/PYu-RC_Group_51_RoHS_L_04.pdf, DatasheetVersion="Rev. 4, 02/2016", Height="0.5 mm", Length="2 mm", Mount="Surface Mount", Mounting Technology="Surface Mount", PackageDescription="2-Pin Surface Mounted Device, Body 2 x 1.25 mm", PackageReference=0805, Packaging="Tape and Reel", Pins=2, REACH SVHC="No SVHC", RoHSCompliant=true
R9 R10: library part CMP-2001-00584-1, Manufacturer=Panasonic, Part Number=ERA-6AEB105V
R11 R12 R13 R14: library part CMP-2100-03671-1, "Chip Resistor, 1 KOhm, +/- 1%, 125 mW, -55 to 155 degC, 0805 (2012 Metric), RoHS, Tape and Reel", Case Code (Imperial)=0805, Case Code (Metric)=2012, Manufacturer=Yageo, Max Operating Temperature=155degC, Max Power Dissipation=125mW, Min Operating Temperature=-55degC, Package Description="2-Pin Surface Mounted Device, Body 2 x 1.25 mm", Package Quantity=1, Resistance=1KOhm, Temperature Coefficient=100ppm/degreesC, Tolerance=1%, Voltage Rating=150V, Case/Package=0805, Composition=ThickFilm, Datasheet URL=http://www.yageo.com/NewPortal/yageodocoutput?fileName=/pdf/R-Chip/PYu-RC_Group_51_RoHS_L_5.pdf, Datasheet Version="Rev. 5, 10/2016", Depth=1.25mm, Height=0.024inch, Lead Free=LeadFree, Length=0.079inch, Manufacturer URL=http://www.yageo.com/, Military Standard=Not, Number of Pins=2, Number of Terminations=2, Package Reference=0805, Packaging=TapeandReel, Power Rating=125mW, REACH SVHC=Unknown, RoHSCompliant=true, Termination=SMD/SMT, Voltage Rating (DC)=150V, Width=0.049inch
R15: library part CMP-2001-00584-1, Manufacturer=Panasonic, Part Number=ERA-6AEB105V
U0: library part CMP-011-000003-1, "No Description Available", Mfr_Name="TE Connectivity", Design Item ID=282837-2, RefDes=RefDes, Source=Schlib2.SchLib, Type=Type
U1: library part CMP-06279-000047-1, "IC TRANSCEIVER 1/1 8SOIC", Case/Package=SOIC, Max Operating Temperature=150°C, Max Supply Voltage=5.5V, Min Operating Temperature=-40°C, Min Supply Voltage=4.5V, Operating Supply Current=70mA, Package Quantity=3300, Data Rate=8Mbps, Mount="Surface Mount", Number of Pins=8, Number of Transceivers=1, Packaging="Tape and Reel", Receiver Hysteresis=200mV, RoHS Compliant=Yes, Series=-, Weight=0.019048oz
U2: library part CMP-06298-000020-1, "IC CAN CONTROLLER SPI 14SOIC", RoHS Compliant=Yes
U3: library part CMP-011-000008-1, "No Description Available", Mfr_Name="Diodes Inc", Design Item ID=AP64350SP-13, RefDes=RefDes, Source=Schlib2.SchLib, Type=Type

## Free pads (board coordinates)
  rect 300x150 all layers, no hole: 3(1230,3270) 4(1230,3026.25) 5(1230,2782.5) 6(1230,2538.75) 7(1230,2295)

## Via types
v1: diameter 50, hole 28, Top Layer to Bottom Layer, 41 vias

## Nets (pads, with @x,y where several pads share a name; then routed paths per layer and width w, separated by ;. In a path a pad name is that pad's centre, name@x,y a point inside that pad or via, vN(x,y) a via of type N, cw(c..) or ccw(c..) an arc to the next point about the centre after c; other vN are vias at no path point)
3.3VIN: BQ769P.8 C8.2 J1.7 R7.2 R8.2 | length 3028.9
  Top Layer w15: J1.7 2244.92,1740 2627,1740 2667,1780 2667,2046 2605,2108 ; BQ769P.8 2424.98,2928.98 v1(2513,3017) ; C8.2 2860,3303.46 2882.64,3280.82 2882.64,3190.64 2779,3087 v1(2779,2944) 2779,2201.65 2717,2139.65 R7.2 2605,2108 ; R8.2 2835,2108 2605,2108
  Bottom Layer w15: v1(2513,3017) 2706,3017 v1(2779,2944)
5VIN: C12.2 C13.2 C14.2 C15.1 C20.2 C21.2 C22.2 J5.1 L1.2 R13.2 U1.3 U1.5 U2.14 | length 9240.2
  Top Layer w15: J5.1 2175,1410 4080,1410 ; v1(2170,2600) 2217.25,2600 2237.25,2620 2237.25,2737.25 2237.25,3086.25 2280,3129 2437,3129 v1(2457,3149) ; v1(2949.94,2389.46) 2949.94,2722.94 3037,2810 C22.2 ; v1(3055.62,2359.49) v1@3034.5,2359.49 ; v1(3081.54,3214) C20.2 ; C14.2 3145,2496.54 C13.2 3020,2448 3034.5,2433.5 v1@3034.5,2359.49 ; L1.2 4080,1410 ; v1@3034.5,2359.49 3034.5,2172.5 3100,2107 3936,2107 4039,2004 4039,1451 4080,1410
  Top Layer w30: C22.2 C21.2 v1(3081.54,3214)
  Bottom Layer w15: v1(2170,2600) 2280,2490 U1.3 ; U1.5 2230,2730 2237.25,2737.25 ; U2.14 2250,3305 2389,3305 ; v1(2457,3149) 2477,3169 2434,3220 2434,3260 2389,3305 ; v1(2949.94,2389.46) v1@2941,2380.52 ; R13.2 2974.46,2513.46 2941,2480 v1@2941,2380.52 ; v1(3055.62,2359.49) 3035.62,2359.49 3149.1,2246 ; v1(3081.54,3214) 3070,3225.54 C15.1 2389,3305 ; C12.2 3850.67,2190 3794.67,2246 3149.1,2246 ; v1@2941,2380.52 2941,2305 3000,2246 3149.1,2246
BAT+: C17.2 pad.3 R5.1 Rf.2 U0.2 U3.2 U3.3 | length 7107.2
  Top Layer w15: R5.1 1645,3280 1682.64,3317.64 2237.64,3317.64 2260,3340 ; Rf.2 2260,3340 ; U0.2 2488.5,3833.5 2488.5,3568.5 2260,3340 ; v1(3145,2150) 3148.46,2153.46 C17.2
  Top Layer w45: pad.3 1255,3245 R5.1
  Bottom Layer w15: U0.2 2918,3847 4200,3847 4242,3805 4242,2397 3997.5,2152.5 ; v1(3145,2150) 3214,2081 3926,2081 3997.5,2152.5 ; U3.2 3940,2625 3997.5,2567.5 3997.5,2152.5
  Bottom Layer w30: U3.3 U3.2
BAT-: C15.2 C17.1 C18.1 C19.1 C20.1 C21.1 C22.1 J1.11 J1.13 J6.3 Q3.3 R10.1 R11.1 R14.1 U0.1 U1.2 U1.8 U2.7 U3.7 | length 13428
  Top Layer w15: Q3.3 1374.53,1755 R10.1 ; U0.1 2910,3744 2936,3718 2936,3546 3148.46,3333.54 C20.1 ; C17.1 3081.54,2316.99 3196.55,2432 v1(3277,2432) ; C21.1 C22.1 3480,2810 3525,2765 3525,2437 3748,2214 4277.26,2214 J6.3
  Top Layer w30: C21.1 C20.1
  Bottom Layer w15: Q3.3 1211.76,1639 1120,1639 1100,1619 1100,1488 1188,1400 1994.92,1400 J1.11 ; U2.7 1950,3160 1970,3180 2283,3180 2356.5,3106.5 2533,3106.5 ; U1.2 2330,2359 2340,2349 2400,2349 2551,2500 2551,2847 2565,2861 3097.46,2861 ; J1.13 2596.17,1688.75 4319.75,1688.75 4495,1864 J6.3 ; C15.2 3136.93,3153.19 3090.24,3106.5 2533,3106.5 ; R14.1 3243.54,2513.46 3277,2480 v1(3277,2432) 3358.46,2513.46 ; C19.1 3358.46,2513.46 ; U3.7 3333.46,2625 3148.46,2810 ; 2533,3106.5 2584.5,3055 C18.1 3070,2888.46 3097.46,2861 ; 3097.46,2861 3148.46,2810 ; 3148.46,2810 3148.46,2725 3358.46,2513.46
  Bottom Layer w30: U1.2 2330,2490 2380,2540 U1.8 ; J1.11 J1.13 ; U3.7 3601.84,2640 3601.84,2840 3691.84,2930 R11.1
BAT_PIN: BQ769P.10 Cf.2 Rf.1 | length 820.2
  Top Layer w15: Rf.1 2179.29,3214.71 2199.67,3194.33 2307.21,3194.33 2383,3270.12 Cf.2 2466.88,3270.12 2549.75,3187.25 2549.75,3128.75 2479.36,3058.36 2400,3058.36 2379,3037.36 2379,2980.16 BQ769P.10
CAN_RX_3.3V: J4.14 U2.12 | length 1766
  Bottom Layer w30: J4.14 2054,3766 1494,3766 1468,3740 1468,3549 1480,3537 2076.52,3537 2150,3463.52 U2.12
CAN_RX_5V: U1.4 U2.2 | length 1717.1
  Top Layer w15: v1(1878,2127) 1966,2127 v1(2188,2349)
  Bottom Layer w15: v1(1878,2127) 1829.94,2175.06 1829.94,2780 1875.83,2825.88 1952.88,2825.88 2200,3073 U2.2 ; v1(2188,2349) 2220,2349 2230,2359 U1.4
CAN_TX_3.3V: J4.12 U2.11 | length 1792.3
  Top Layer w30: v1(1884,3836) J4.12
  Bottom Layer w30: v1(1884,3836) 1480,3836 1428,3784 1428,3474 1467,3435 2075,3435 2100,3410 U2.11
CAN_TX_5V: U1.1 U2.1 | length 853.6
  Bottom Layer w15: U2.1 2250,2931 2504,2677 2504,2618.04 2380,2494.04 U1.1
CANH: J6.1 U1.7 | length 2842.3
  Top Layer w15: v1(2330,2220) v1(2330,2690)
  Bottom Layer w15: v1(2330,2220) 2663.7,2220 2850.7,2033 4374.26,2033 J6.1 ; U1.7 v1(2330,2690)
CANL: J6.2 U1.6 | length 4261.2
  Bottom Layer w15: U1.6 2280,2753 2260,2773 1900,2773 1854.94,2727.94 1854.94,2307.16 2047.1,2115 2312,2115 2440,1987 2440,1865 2460,1845 3520,1845 3541,1824 3541,1740 3567,1714 4287,1714 4451,1878 4451,2031 J6.2
CHG_DSG: Q2.3 R9.1 RSNS.1 | length 1255.5
  Top Layer w15: R9.1 1983,2070 2230.5,2317.5 2230.5,2391.35 2230.35,2391.5 RSNS.1
  Top Layer w30: Q2.3 1779.06,1634.06 R9.1
CHG_FET: D1.1 Q3.1 R10.2 R15.1 | length 613.7
  Top Layer w30: R15.1 1252.28,1630.47 Q3.1 1383.23,1610.47 R10.2
  Bottom Layer w30: D1.1 1156.11,1555 Q3.1
CHG_PIN: BQ769P.2 Q1.2 | length 395.6
  Top Layer w15: BQ769P.2 2440,2775.43 2489.69,2725.75 Q1.2
DSG_PIN: BQ769P.1 Q2.1 R9.2 | length 2077.9
  Top Layer w15: Q2.1 1685,2035 R9.2 ; v1(2339,1946) 2284.5,1946 2239.5,1991 2239.5,2036 2374,2170.5 2374,2749.84 BQ769P.1
  Bottom Layer w15: Q2.1 1790,1845 2324,1845 2339,1860 v1(2339,1946)
GND: BQ769P.3 BQ769P.18 C1.2 C2.1 C6.1 C7.1 C8.1 C9.1 C9.2 C10.2 C11.1 C12.1 C13.1 C14.1 Cf.1 J5.2 J7.2 pad.7 Q1.1 R1.1 RSNS.2 | length 9519.8
  Top Layer w15: C1.2 1977.56,2260 1950.56,2233 1660,2233 1645,2248 R1.1 1631,2288.94 1631,1486 1761,1356 1946,1356 1990,1400 J5.2 ; C2.1 1977.56,2572.64 2047.94,2643.02 2047.94,2768.96 2080,2801.02 BQ769P.18 2180,2801.02 2210.41,2831.44 2210.41,3140 2231.91,3161.5 2310.5,3161.5 2364,3215 Cf.1 ; BQ769P.3 2526.37,2801.02 2579.89,2747.5 ; v1(2397,1965) 2489.69,2057.69 Q1.1 ; C9.2 2601.24,2401.36 ; C10.2 2619.88,2707.51 2579.89,2747.5 ; v1(2736,2266.6) 2601.24,2401.36 ; C6.1 2831.06,2411.94 2920,2323 2992.5,2323 3009.5,2393.5 2974.94,2428.06 2974.94,2550 C13.1 ; C8.1 2688.23,3248.35 2619.88,3180 C11.1 2619.88,2994.12 2675,2939 C7.1 2675,2802.62 2619.88,2747.5 2579.89,2747.5 ; C14.1 3320,2568.46 3347,2541.46 v1(3347,2190) ; Q1.1 2601.24,2401.36 ; Q1.1 2600,2402.6 2601.24,2401.36
  Top Layer w30: C1.2 C2.1 2003.5,2527.77 2081.26,2450 RSNS.2 ; C10.2 C9.2 C9.1 ; C13.1 3145,2563.46 3150,2568.46 C14.1
  Top Layer w45: pad.7 1236.06,2288.94 R1.1@1631,2288.94
  Bottom Layer w15: pad.7 1583,2295 1804,2074 2288,2074 v1(2397,1965) ; v1(2736,2266.6) 2803.6,2199 3160,2199 3169,2190 v1(3347,2190) C12.1
GPIOAlert: BQ769P.20 J1.14 | length 1447.8
  Top Layer w15: v1(2042,2576) 2082.5,2576 2181.5,2675 2181.5,2738.34 2170,2749.84 BQ769P.20
  Bottom Layer w15: v1(2042,2576) 1879.94,2413.94 1879.94,2330.06 2070,2140 2332.76,2140 2465,2007.76 2465,1919.92 J1.14
GPIOBoot: J1.16 Q0.1 | length 617.4
  Bottom Layer w15: Q0.1 2287.32,2197.6 2319.23,2165.7 2440,2165.7 2490,2115.7 2490,1994.92 J1.16
nCS: J3.2 U2.13 | length 594.7
  Bottom Layer w30: U2.13 2200,3351 2366,3517 2440,3517 2483,3560 2483,3593 J3.2
NetBQ769P_6: BQ769P.6 J7.1 R6.1 | length 3135.1
  Top Layer w15: J7.1 2410.99,4143 2732,4143 2775,4100 2775,3998.5 2528.5,3752 2528.5,3549.5 2540,3538 ; BQ769P.6 2532.55,2877.8 2574.75,2920 2574.75,3503.25 2540,3538 ; R6.1 2900,2865.43 2922.64,2888.08 2922.64,3337.45 2722.1,3538 2540,3538
NetBQ769P_7: BQ769P.7 C6.2 | length 1061
  Top Layer w15: BQ769P.7 2487.39,2903.39 v1(2512,2928) ; C6.2 2831.06,2605 2804.5,2631.56 2804.5,2892.5 2833,2921 v1(2833,2997.5)
  Bottom Layer w15: v1(2512,2928) 2554.5,2970.5 2653.5,2970.5 2722.5,2901.5 2800,2901.5 2833,2934.5 v1(2833,2997.5)
NetBQ769P_9: BQ769P.9 C7.2 | length 486.8
  Top Layer w15: BQ769P.9 2400,2954.57 2424,2978.57 v1(2424,3010) ; C7.2 v1(2619.88,2928)
  Bottom Layer w15: v1(2424,3010) 2424,2920 2472,2872 2522.84,2872 2578.84,2928 v1(2619.88,2928)
NetBQ769P_12: BQ769P.12 C5.2 R5.2 | length 730.8
  Top Layer w15: C5.2 1922.44,3269.58 1938,3285.14 2017,3285.14 2083,3219.14 2083,2970 2098.43,2954.57 BQ769P.12
  Top Layer w30: R5.2 1822,3245 1825.94,3241.06 C5.2
NetBQ769P_13: BQ769P.13 BQ769P.14 C4.2 C5.1 R4.2 | length 772.6
  Top Layer w15: C4.2 1922.44,3037.88 1944.56,3060 2010.56,3060 ; C5.1 1977.56,3093 2010.56,3060 ; BQ769P.14 BQ769P.13 2080,2928.98 2037,2971.98 2037,3033.56 2010.56,3060
  Top Layer w30: R4.2 1815,3020 1831.7,3003.3 C4.2
NetBQ769P_15: BQ769P.15 C3.2 C4.1 R3.2 | length 666
  Top Layer w15: C3.2 1922.44,2856 1944.24,2877.8 2039.76,2877.8 ; C4.1 1977.56,2940 2039.76,2877.8 ; BQ769P.15 2039.76,2877.8
  Top Layer w30: R3.2 1819,2775 1828.47,2765.53 C3.2
NetBQ769P_16: BQ769P.16 C2.2 C3.1 Q0.2 R2.2 | length 1457.5
  Top Layer w15: v1(1922.44,2353.29) C2.2 ; v1(1975,2710) 1977.56,2712.56 C3.1 1977.56,2829.76 2000,2852.2 BQ769P.16
  Top Layer w30: R2.2 1823,2527.95 1823.19,2527.77 C2.2
  Bottom Layer w15: v1(1922.44,2353.29) 2099.5,2530.35 ; v1(1975,2710) 2099.5,2585.5 2099.5,2530.35 ; Q0.2 2120,2272.4 2099.5,2292.9 2099.5,2530.35
NetBQ769P_17: BQ769P.17 C1.1 R1.2 | length 1251.6
  Top Layer w15: R1.2 1725.71,2320 ; C1.1 1755.71,2290 1725.71,2320 ; BQ769P.17 2063.61,2826.61 2017.5,2780.5 2017.5,2680 2005,2667.5 1682.5,2667.5 1602,2587 1602,2443.71 1725.71,2320
NetC16_1: C16.1 L1.1 U3.8 | length 3128.5
  Top Layer w15: v1(3687,2841) 3720,2874 3996,2874 4539,2331 4539,1410 L1.1
  Bottom Layer w15: C16.1 3574.54,2941.54 3616.55,2983.55 3870,2983.55 3882.99,2970.55 3882.99,2759.99 3830,2707 3722.14,2707 U3.8 3687,2675 v1(3687,2841)
NetC16_2: C16.2 U3.1 | length 865.7
  Bottom Layer w30: C16.2 3562,3008.46 3583.7,3030.16 3893.38,3030.16 3922.99,3000.55 3922.99,2675 U3.1
NetC18_2: C18.2 R12.1 | length 472.2
  Bottom Layer w30: C18.2 3184.59,3055 3229.59,3100 3229.59,3229.66 3313.67,3313.74 R12.1
NetC19_2: C19.2 R12.2 U3.6 | length 1156.8
  Top Layer w30: v1(3564,3122) 3628,3058 v1(3628,2575)
  Bottom Layer w30: C19.2 3499.54,2446.54 v1(3628,2575) U3.6 ; R12.2 3425.98,3158 3461.98,3122 v1(3564,3122)
NetD1_2: D1.2 Q1.3 R15.2 | length 2013.9
  Top Layer w15: v1(1095,1785) R15.2 v1(1418.47,2013) ; v1(2282,2013) 2420,2151 Q1.3
  Bottom Layer w15: v1(1095,1785) 1120,1785 1140,1765 D1.2 ; v1(1418.47,2013) v1(2282,2013)
NetQ0_3: Q0.3 R6.2 | length 1022.8
  Top Layer w15: R6.2 2867,2794.57 v1(2867,2678)
  Bottom Layer w15: Q0.3 2257.21,2235 2257.21,2246.91 2272.8,2262.5 2593.5,2262.5 2867,2536 v1(2867,2678)
NetQ2_2: Q2.2 Q3.2 | length 357.8
  Bottom Layer w15: Q3.2 1492,1655 Q2.2
NetR11_2: R11.2 U3.4 | length 1007.8
  Top Layer w15: v1(3746,2774) 3903,2617 v1(3903,2282)
  Bottom Layer w15: v1(3746,2774) 3810,2838 3810,2930 R11.2 ; U3.4 3903,2525 v1(3903,2282)
NetR13_1: R13.1 R14.2 U3.5 | length 823
  Bottom Layer w15: R14.2 3200.49,2380 3234.39,2346.1 3496.77,2346.1 3675.67,2525 U3.5
  Bottom Layer w30: R13.1 R14.2
OSC1: J3.4 U2.6 | length 2623.4
  Bottom Layer w30: U2.6 1980,3046 1777,3046 1388,3435 1388,3834 1440,3886 2494,3886 J3.4
SCK: J4.10 U2.10 | length 1457.4
  Top Layer w30: v1(1548,3380) 1468,3460 1468,3740 1494,3766 1854,3766 J4.10
  Bottom Layer w30: v1(1548,3380) 2030,3380 2050,3360 U2.10
SCL_3.3V: BQ769P.5 J2.19 R7.1 | length 4311.7
  Top Layer w15: BQ769P.5 2320,2852.2 2277.5,2809.7 2277.5,2277.5 2214.5,2214.5 2214.5,1945.5 2240,1920 2240,1866 2260,1846 2520,1846 2540,1866 v1@2540,2029.29 ; v1(2543.35,2032.65) 2543.35,2200 2563.71,2220.35 R7.1
  Bottom Layer w15: v1@2540,2029.29 v1(2543.35,2032.65) 2623,1953 4226,1953 4247,1932 4247,1760 4226,1739 3746,1739 J2.19
SDA_3.3V: BQ769P.4 J2.21 R8.1 | length 2869.4
  Top Layer w15: BQ769P.4 2577.39,2826.61 v1(2594,2810) ; v1(2822,2351) 2835,2338 R8.1 2870.65,2220.35 2891,2200 2891,2082.5 2733,1924.5 2733,1712 2752,1693 3688,1693 J2.21
  Bottom Layer w15: v1(2594,2810) 2840,2810 2910,2740 2910,2439 v1(2822,2351)
SRN_PIN: BQ769P.19 C10.1 C11.2 | length 1901.1
  Top Layer w15: v1(2124.5,2696) 2079,2741.5 2079,2755 2099.43,2775.43 BQ769P.19 ; C10.1 2675,2716 2726,2767 ; C11.2 2700,3075 2726,3049 2726,2767 ; v1(2726,2541.08) 2726,2767
  Bottom Layer w15: v1(2124.5,2696) 2124.5,2340 2158.5,2306 2490.92,2306 v1(2726,2541.08)
V1: pad.6 R2.1 | length 505.7
  Top Layer w15: v1(1645,2467) R2.1
  Bottom Layer w15: pad.6 1573.25,2538.75 v1(1645,2467)
V2: pad.5 R3.1 | length 418.1
  Top Layer w45: pad.5 1237.5,2775 R3.1
V3: pad.4 R4.1 | length 417.6
  Top Layer w45: pad.4 1236.25,3020 R4.1
pads on no net: BQ769P.11 J1.1 J1.2 J1.3 J1.4 J1.5 J1.6 J1.8 J1.9 J1.10 J1.12 J1.15 J2.1 J2.2 J2.3 J2.4 J2.5 J2.6 J2.7 J2.8 J2.9 J2.10 J2.11 J2.12 J2.13 J2.14 J2.15 J2.16 J2.17 J2.18 J2.20 J2.22 J2.23 J2.24 J2.25 J2.26 J2.27 J2.28 J2.29 J2.30 J3.1 J3.3 J3.5 J3.6 J3.7 J3.8 J3.9 J3.10 J3.11 J3.12 J3.13 J3.14 J3.15 J3.16 J3.17 J3.18 J3.19 J3.20 J3.21 J3.22 J3.23 J3.24 J3.25 J3.26 J3.27 J3.28 J3.29 J3.30 J3.31 J3.32 J3.33 J3.34 J4.1 J4.2 J4.3 J4.4 J4.5 J4.6 J4.7 J4.8 J4.9 J4.11 J4.13 J4.15 J4.16 J4.17 J4.18 J4.19 J4.20 U2.3 U2.4 U2.5 U2.8 U2.9 U3.EPAD

## Polygon pours and split planes (outlines as drawn)
GND on Bottom Layer "GND_L04_P001" (solid, pour order 1): 1152.44,2906.86 1152.44,3881.86 cw(c1252.44,3881.86) 1252.44,3981.86 4562.24,3981.86 cw(c4562.44,3881.86) 4662.44,3881.86 4662.44,1161.86 cw(c4562.44,1161.86) 4562.44,1061.86 1257.44,1061.86 cw(c1257.44,1161.86) 1157.44,1161.86 1157.44,2401.86
no net on Layer 2 (split plane): 4632.84,4259.61 4640.61,4258.46 4648.22,4256.55 4655.61,4253.91 4662.71,4250.55 4669.44,4246.51 4675.75,4241.84 4681.57,4236.57 4686.84,4230.75 4691.51,4224.44 4695.55,4217.71 4698.91,4210.61 4701.55,4203.22 4703.46,4195.61 4704.61,4187.84 4704.97,4180.63 4704.9,4180 4704.9,1105 4704.97,1104.37 4704.61,1097.16 4703.46,1089.39 4701.55,1081.78 4698.91,1074.39 4695.55,1067.29 4691.51,1060.56 4686.84,1054.25 4681.57,1048.43 4675.75,1043.16 4669.44,1038.49 4662.71,1034.45 4655.61,1031.09 4648.22,1028.45 4640.61,1026.54 4632.84,1025.39 4625.63,1025.03 4625,1025.1 1140,1025.1 1139.37,1025.03 1132.16,1025.39 1124.39,1026.54 1116.78,1028.45 1109.39,1031.09 1102.29,1034.45 1095.56,1038.49 1089.25,1043.16 1083.43,1048.43 1078.16,1054.25 1073.49,1060.56 1069.45,1067.29 1066.09,1074.39 1063.45,1081.78 1061.54,1089.39 1060.39,1097.16 1060.03,1104.37 1060.1,1105 1060.1,2625 1060.1,4180 1060.03,4180.63 1060.39,4187.84 1061.54,4195.61 1063.45,4203.22 1066.09,4210.61 1069.45,4217.71 1073.49,4224.44 1078.16,4230.75 1083.43,4236.57 1089.25,4241.84 1095.56,4246.51 1102.29,4250.55 1109.39,4253.91 1116.78,4256.55 1124.39,4258.46 1132.16,4259.61 1139.37,4259.97 1140,4259.9 4625,4259.9 4625.63,4259.97
no net on Layer 1 (split plane): 4632.84,4259.61 4640.61,4258.46 4648.22,4256.55 4655.61,4253.91 4662.71,4250.55 4669.44,4246.51 4675.75,4241.84 4681.57,4236.57 4686.84,4230.75 4691.51,4224.44 4695.55,4217.71 4698.91,4210.61 4701.55,4203.22 4703.46,4195.61 4704.61,4187.84 4704.97,4180.63 4704.9,4180 4704.9,1105 4704.97,1104.37 4704.61,1097.16 4703.46,1089.39 4701.55,1081.78 4698.91,1074.39 4695.55,1067.29 4691.51,1060.56 4686.84,1054.25 4681.57,1048.43 4675.75,1043.16 4669.44,1038.49 4662.71,1034.45 4655.61,1031.09 4648.22,1028.45 4640.61,1026.54 4632.84,1025.39 4625.63,1025.03 4625,1025.1 1140,1025.1 1139.37,1025.03 1132.16,1025.39 1124.39,1026.54 1116.78,1028.45 1109.39,1031.09 1102.29,1034.45 1095.56,1038.49 1089.25,1043.16 1083.43,1048.43 1078.16,1054.25 1073.49,1060.56 1069.45,1067.29 1066.09,1074.39 1063.45,1081.78 1061.54,1089.39 1060.39,1097.16 1060.03,1104.37 1060.1,1105 1060.1,2625 1060.1,4180 1060.03,4180.63 1060.39,4187.84 1061.54,4195.61 1063.45,4203.22 1066.09,4210.61 1069.45,4217.71 1073.49,4224.44 1078.16,4230.75 1083.43,4236.57 1089.25,4241.84 1095.56,4246.51 1102.29,4250.55 1109.39,4253.91 1116.78,4256.55 1124.39,4258.46 1132.16,4259.61 1139.37,4259.97 1140,4259.9 4625,4259.9 4625.63,4259.97

## Text inside footprints (layer, text, board x,y; h text height)
U3: Mechanical 13 "*" at 3871.64,2644.5 h50; Bottom Overlay "*" at 3924.64,2692 h50